# Altium PCB PCB3.PcbDoc
Units mm, origin at the board's own origin, x right, y up, seen from the top; angles counter-clockwise.
Board outline 97 x 213 mm, 2 copper layers (Top Layer, Bottom Layer); 120 components, 32 nets, 214 pads, 0 vias.
Unrouted connection lines stored in the file: 57.
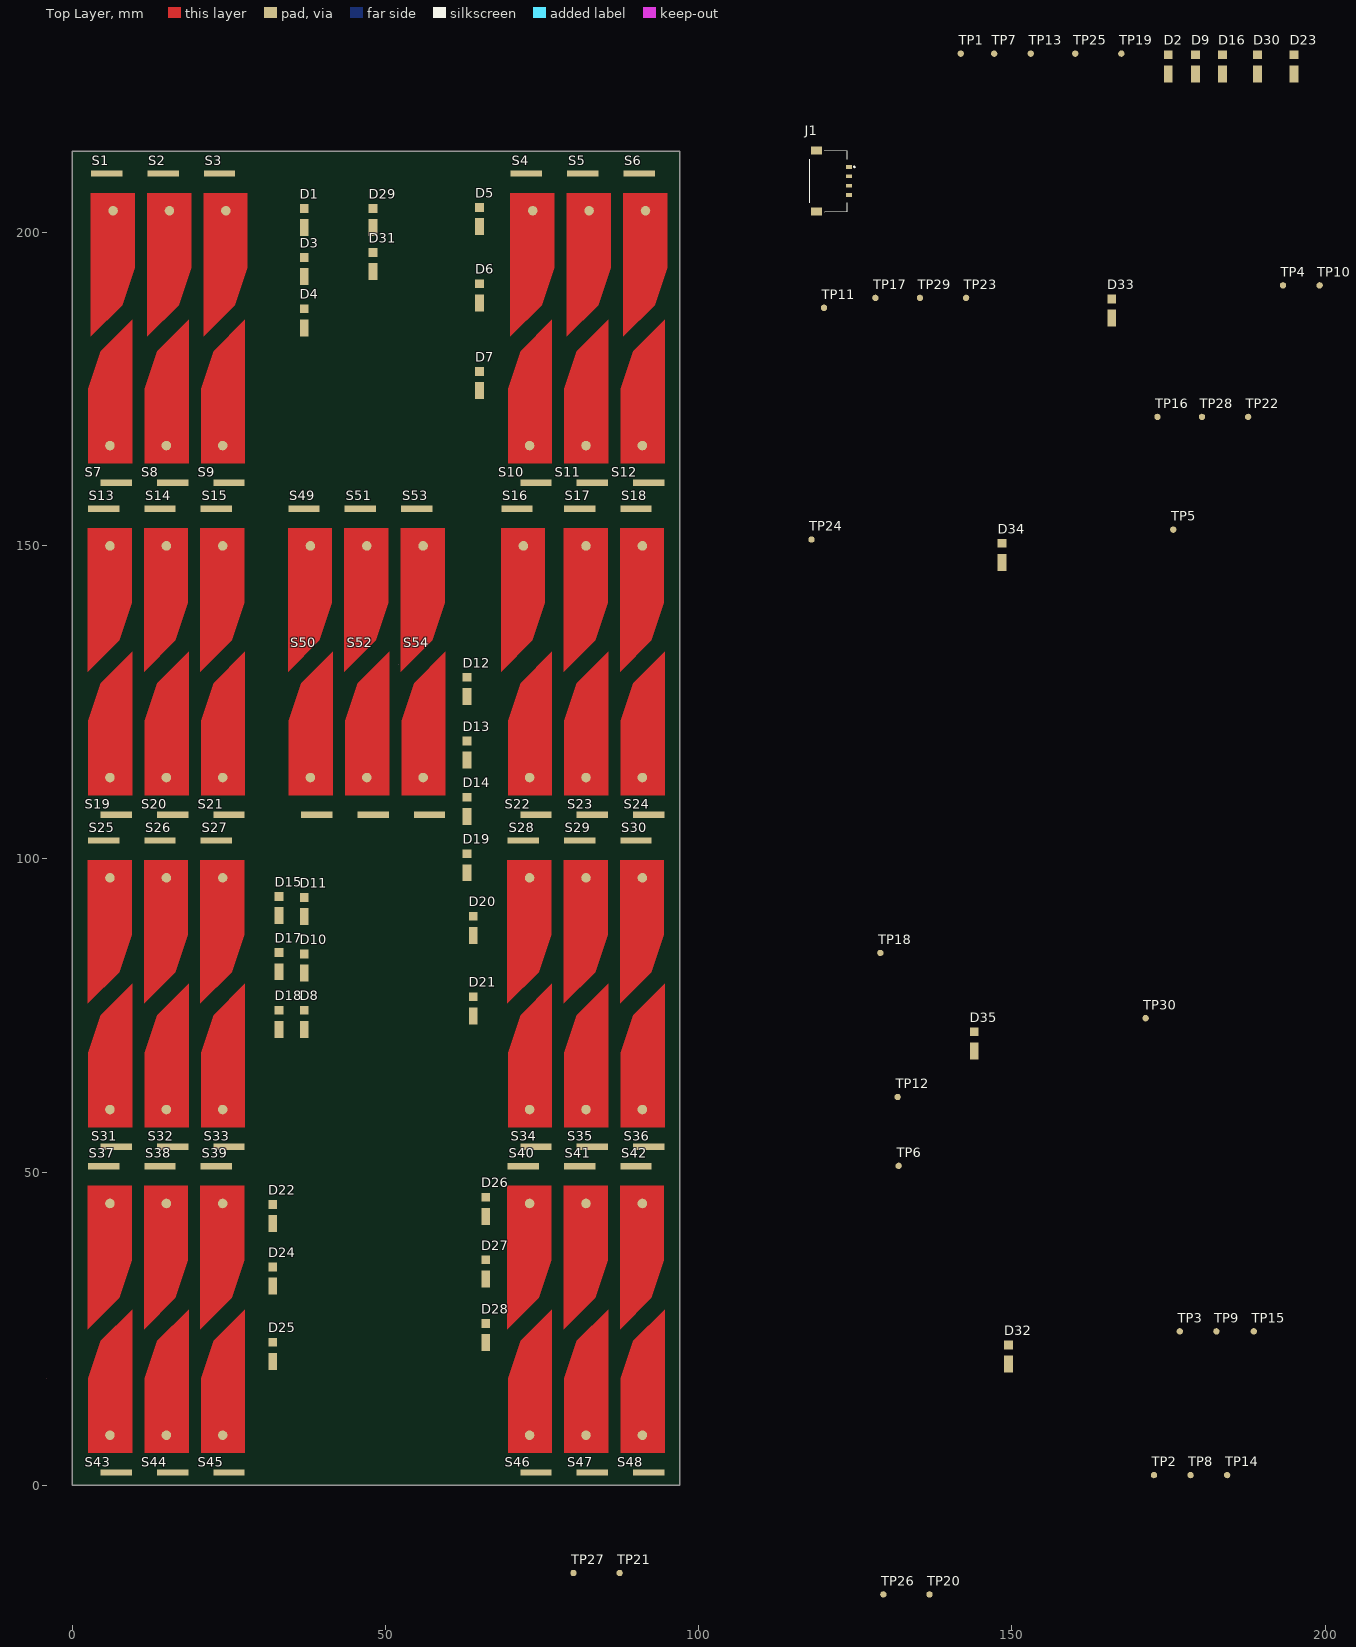
[diagram p0: Top Layer view]
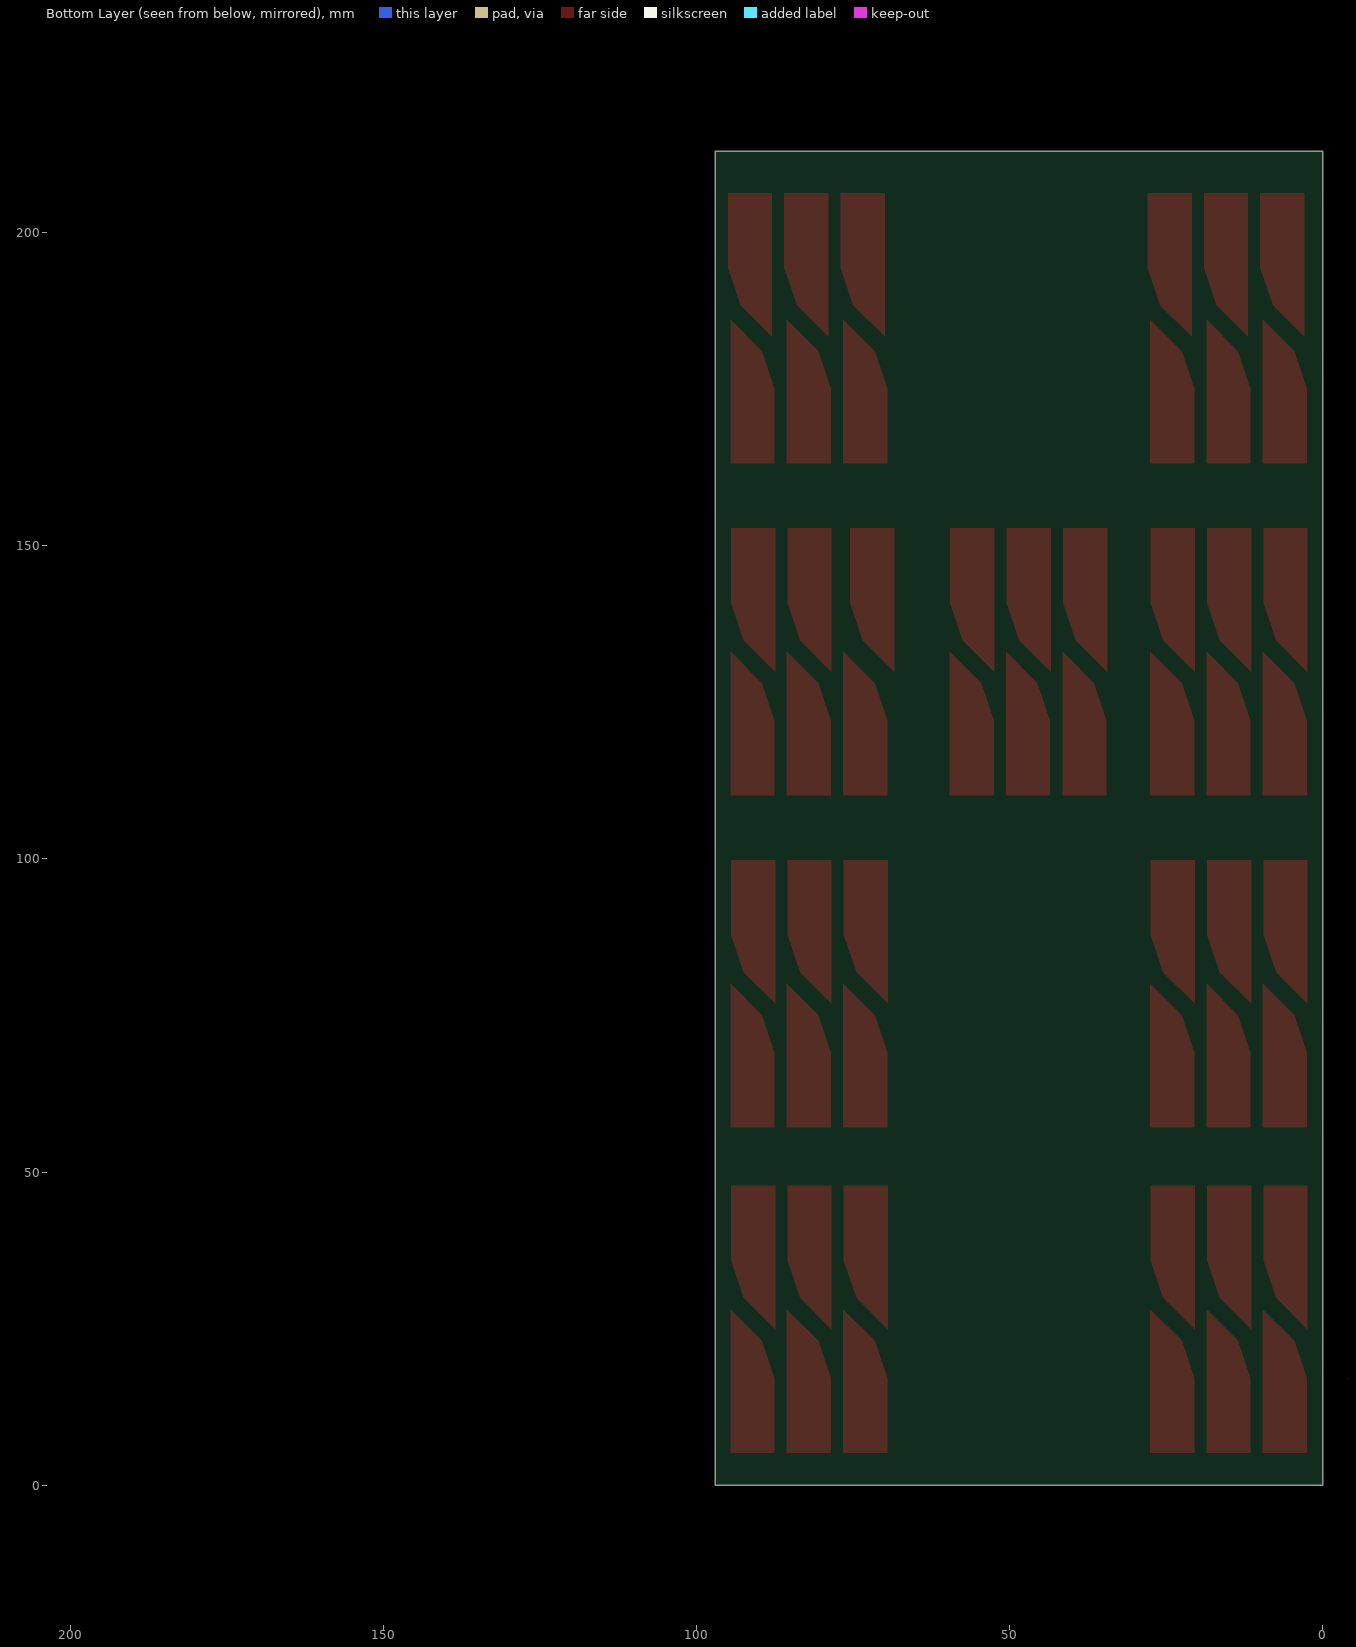
[diagram p1: Bottom Layer view, seen from below]

## Layer stack, top to bottom
Top Solder: solder mask 0.0102, Solder Resist, Dk 3.5
Top Layer: signal copper 0.0356
Dielectric 1: dielectric 0.32, FR-4, Dk 4.8
Bottom Layer: signal copper 0.0356
Bottom Solder: solder mask 0.0102, Solder Resist, Dk 3.5

## Board outline
0,0 97,0 97,213 0,213
cut-out: 52,131
cut-out: -4.127,17

## Design rules (kind name [scope] priority, off if disabled: settings)
Clearance [All] p1: gap=0.254 ignorepadtopadclearanceinfootprint=FALSE except(0: Arc-Hole Track-Hole SMDPad-Hole THPad-Hole Via-Hole Fill-Hole Poly-Hole Region-Hole Text-Hole)
PolygonConnect [All] p1: connectstyle=Relief reliefconductorwidth=0.254 reliefentries=4 polygonreliefangle="90 Angle" airgapwidth=0.254
RoomDefinition SolarPanel4 [InComponentClass('SolarPanel4')] p1: confinementstyle=ConfineIn formatcopy=TRUE lockcomponents=FALSE outline 0,0 97,0 97,213 0,213
RoutingVias [All] p1: holewidth=0.711 width=1.27 viastyle="Through Hole" minholewidth=0.711 minwidth=1.27 maxholewidth=0.711 maxwidth=1.27
SolderMaskExpansion [All] p1: expansion=0.102
Width [All] p1: maxlimit=0.254 minlimit=0.254 preferedwidth=0.254
30 further rules are at their usual default settings.

## Components (designator, comment, footprint, x,y, rotation, side; value= is the part's Value field where it differs from the comment)
D1 "SCHOTTKY_DIODE_B120-FDICT-NDSCHOTTKY_DIODE_B120-FDICT-ND" SB_DIODE 37,202 r90 top (schematic designator D2)
D2 "SCHOTTKY_DIODE_B120-FDICT-NDSCHOTTKY_DIODE_B120-FDICT-ND" SB_DIODE 174.976,226.55 r90 top
D3 "SCHOTTKY_DIODE_B120-FDICT-NDSCHOTTKY_DIODE_B120-FDICT-ND" SB_DIODE 37,194.2 r90 top
D4 "SCHOTTKY_DIODE_B120-FDICT-NDSCHOTTKY_DIODE_B120-FDICT-ND" SB_DIODE 37,186 r90 top
D5 "SCHOTTKY_DIODE_B120-FDICT-NDSCHOTTKY_DIODE_B120-FDICT-ND" SB_DIODE 65,202.15 r90 top
D6 "SCHOTTKY_DIODE_B120-FDICT-NDSCHOTTKY_DIODE_B120-FDICT-ND" SB_DIODE 65,190 r90 top
D7 "SCHOTTKY_DIODE_B120-FDICT-NDSCHOTTKY_DIODE_B120-FDICT-ND" SB_DIODE 65,176 r90 top
D8 "SCHOTTKY_DIODE_B120-FDICT-NDSCHOTTKY_DIODE_B120-FDICT-ND" SB_DIODE 37,74 r90 top
D9 "SCHOTTKY_DIODE_B120-FDICT-NDSCHOTTKY_DIODE_B120-FDICT-ND" SB_DIODE 179.294,226.55 r90 top
D10 "SCHOTTKY_DIODE_B120-FDICT-NDSCHOTTKY_DIODE_B120-FDICT-ND" SB_DIODE 37,83 r90 top
D11 "SCHOTTKY_DIODE_B120-FDICT-NDSCHOTTKY_DIODE_B120-FDICT-ND" SB_DIODE 37,92 r90 top
D12 "SCHOTTKY_DIODE_B120-FDICT-NDSCHOTTKY_DIODE_B120-FDICT-ND" SB_DIODE 63,127.15 r90 top
D13 "SCHOTTKY_DIODE_B120-FDICT-NDSCHOTTKY_DIODE_B120-FDICT-ND" SB_DIODE 63,117 r90 top
D14 "SCHOTTKY_DIODE_B120-FDICT-NDSCHOTTKY_DIODE_B120-FDICT-ND" SB_DIODE 63,108 r90 top
D15 "SCHOTTKY_DIODE_B120-FDICT-NDSCHOTTKY_DIODE_B120-FDICT-ND" SB_DIODE 33,92.15 r90 top (schematic designator D16)
D16 "SCHOTTKY_DIODE_B120-FDICT-NDSCHOTTKY_DIODE_B120-FDICT-ND" SB_DIODE 183.612,226.55 r90 top
D17 "SCHOTTKY_DIODE_B120-FDICT-NDSCHOTTKY_DIODE_B120-FDICT-ND" SB_DIODE 33,83.2 r90 top
D18 "SCHOTTKY_DIODE_B120-FDICT-NDSCHOTTKY_DIODE_B120-FDICT-ND" SB_DIODE 33,74 r90 top
D19 "SCHOTTKY_DIODE_B120-FDICT-NDSCHOTTKY_DIODE_B120-FDICT-ND" SB_DIODE 63,99 r90 top
D20 "SCHOTTKY_DIODE_B120-FDICT-NDSCHOTTKY_DIODE_B120-FDICT-ND" SB_DIODE 64,89 r90 top
D21 "SCHOTTKY_DIODE_B120-FDICT-NDSCHOTTKY_DIODE_B120-FDICT-ND" SB_DIODE 64,76.15 r90 top
D22 "SCHOTTKY_DIODE_B120-FDICT-NDSCHOTTKY_DIODE_B120-FDICT-ND" SB_DIODE 32,43 r90 top (schematic designator D23)
D23 "SCHOTTKY_DIODE_B120-FDICT-NDSCHOTTKY_DIODE_B120-FDICT-ND" SB_DIODE 195.042,226.55 r90 top
D24 "SCHOTTKY_DIODE_B120-FDICT-NDSCHOTTKY_DIODE_B120-FDICT-ND" SB_DIODE 32,33 r90 top
D25 "SCHOTTKY_DIODE_B120-FDICT-NDSCHOTTKY_DIODE_B120-FDICT-ND" SB_DIODE 32,21 r90 top
D26 "SCHOTTKY_DIODE_B120-FDICT-NDSCHOTTKY_DIODE_B120-FDICT-ND" SB_DIODE 66,44.15 r90 top
D27 "SCHOTTKY_DIODE_B120-FDICT-NDSCHOTTKY_DIODE_B120-FDICT-ND" SB_DIODE 66,34.15 r90 top
D28 "SCHOTTKY_DIODE_B120-FDICT-NDSCHOTTKY_DIODE_B120-FDICT-ND" SB_DIODE 66,24 r90 top
D29 "SCHOTTKY_DIODE_B120-FDICT-NDSCHOTTKY_DIODE_B120-FDICT-ND" SB_DIODE 48,202 r90 top
D30 "SCHOTTKY_DIODE_B120-FDICT-NDSCHOTTKY_DIODE_B120-FDICT-ND" SB_DIODE 189.2,226.55 r90 top
D31 "SCHOTTKY_DIODE_B120-FDICT-NDSCHOTTKY_DIODE_B120-FDICT-ND" SB_DIODE 48,195 r90 top
D32 "SCHOTTKY_DIODE_B120-FDICT-NDSCHOTTKY_DIODE_B120-FDICT-ND" SB_DIODE 149.45,20.55 r90 top
D33 "SCHOTTKY_DIODE_B120-FDICT-NDSCHOTTKY_DIODE_B120-FDICT-ND" SB_DIODE 165.925,187.55 r90 top
D34 "SCHOTTKY_DIODE_B120-FDICT-NDSCHOTTKY_DIODE_B120-FDICT-ND" SB_DIODE 148.4,148.55 r90 top
D35 "SCHOTTKY_DIODE_B120-FDICT-NDSCHOTTKY_DIODE_B120-FDICT-ND" SB_DIODE 143.986,70.55 r90 top
J1 "5040500491" 5040500491 120.753,208.25 r90 top
S1 "SOLAR_CELL" SOLAR_CELL 2.944,183.434 r0 top (schematic designator S2)
S2 "SOLAR_CELL" SOLAR_CELL 11.944,183.434 r0 top (schematic designator S3)
S3 "SOLAR_CELL" SOLAR_CELL 20.944,183.434 r0 top (schematic designator S4)
S4 "SOLAR_CELL" SOLAR_CELL 69.944,183.434 r0 top (schematic designator S1)
S5 "SOLAR_CELL" SOLAR_CELL 78.944,183.434 r0 top
S6 "SOLAR_CELL" SOLAR_CELL 87.944,183.434 r0 top
S7 "SOLAR_CELL" SOLAR_CELL 9.556,186.066 r180 top
S8 "SOLAR_CELL" SOLAR_CELL 18.556,186.066 r180 top
S9 "SOLAR_CELL" SOLAR_CELL 27.556,186.066 r180 top
S10 "SOLAR_CELL" SOLAR_CELL 76.556,186.066 r180 top
S11 "SOLAR_CELL" SOLAR_CELL 85.556,186.066 r180 top
S12 "SOLAR_CELL" SOLAR_CELL 94.556,186.066 r180 top
S13 "SOLAR_CELL" SOLAR_CELL 2.444,129.934 r0 top
S14 "SOLAR_CELL" SOLAR_CELL 11.444,129.934 r0 top
S15 "SOLAR_CELL" SOLAR_CELL 20.444,129.934 r0 top
S16 "SOLAR_CELL" SOLAR_CELL 68.444,129.934 r0 top
S17 "SOLAR_CELL" SOLAR_CELL 78.444,129.934 r0 top
S18 "SOLAR_CELL" SOLAR_CELL 87.444,129.934 r0 top
S19 "SOLAR_CELL" SOLAR_CELL 9.556,133.066 r180 top
S20 "SOLAR_CELL" SOLAR_CELL 18.556,133.066 r180 top
S21 "SOLAR_CELL" SOLAR_CELL 27.556,133.066 r180 top
S22 "SOLAR_CELL" SOLAR_CELL 76.556,133.066 r180 top
S23 "SOLAR_CELL" SOLAR_CELL 85.556,133.066 r180 top
S24 "SOLAR_CELL" SOLAR_CELL 94.556,133.066 r180 top
S25 "SOLAR_CELL" SOLAR_CELL 2.444,76.934 r0 top
S26 "SOLAR_CELL" SOLAR_CELL 11.444,76.934 r0 top
S27 "SOLAR_CELL" SOLAR_CELL 20.444,76.934 r0 top
S28 "SOLAR_CELL" SOLAR_CELL 69.444,76.934 r0 top
S29 "SOLAR_CELL" SOLAR_CELL 78.444,76.934 r0 top
S30 "SOLAR_CELL" SOLAR_CELL 87.444,76.934 r0 top
S31 "SOLAR_CELL" SOLAR_CELL 9.556,80.066 r180 top
S32 "SOLAR_CELL" SOLAR_CELL 18.556,80.066 r180 top
S33 "SOLAR_CELL" SOLAR_CELL 27.556,80.066 r180 top
S34 "SOLAR_CELL" SOLAR_CELL 76.556,80.066 r180 top
S35 "SOLAR_CELL" SOLAR_CELL 85.556,80.066 r180 top
S36 "SOLAR_CELL" SOLAR_CELL 94.556,80.066 r180 top
S37 "SOLAR_CELL" SOLAR_CELL 2.444,24.934 r0 top
S38 "SOLAR_CELL" SOLAR_CELL 11.444,24.934 r0 top
S39 "SOLAR_CELL" SOLAR_CELL 20.444,24.934 r0 top
S40 "SOLAR_CELL" SOLAR_CELL 69.444,24.934 r0 top
S41 "SOLAR_CELL" SOLAR_CELL 78.444,24.934 r0 top
S42 "SOLAR_CELL" SOLAR_CELL 87.444,24.934 r0 top
S43 "SOLAR_CELL" SOLAR_CELL 9.556,28.066 r180 top
S44 "SOLAR_CELL" SOLAR_CELL 18.556,28.066 r180 top
S45 "SOLAR_CELL" SOLAR_CELL 27.556,28.066 r180 top
S46 "SOLAR_CELL" SOLAR_CELL 76.556,28.066 r180 top
S47 "SOLAR_CELL" SOLAR_CELL 85.556,28.066 r180 top
S48 "SOLAR_CELL" SOLAR_CELL 94.556,28.066 r180 top
S49 "SOLAR_CELL" SOLAR_CELL 34.444,129.934 r0 top
S50 "SOLAR_CELL" SOLAR_CELL 41.556,133.066 r180 top
S51 "SOLAR_CELL" SOLAR_CELL 43.444,129.934 r0 top
S52 "SOLAR_CELL" SOLAR_CELL 50.556,133.066 r180 top
S53 "SOLAR_CELL" SOLAR_CELL 52.444,129.934 r0 top
S54 "SOLAR_CELL" SOLAR_CELL 59.556,133.066 r180 top
TP1 "TEST_POINT" TEST_POINT 141.829,228.582 r90 top
TP2 "TEST_POINT" TEST_POINT 172.684,1.635 r90 top
TP3 "TEST_POINT" TEST_POINT 176.81,24.582 r90 top
TP4 "TEST_POINT" TEST_POINT 193.285,191.582 r90 top
TP5 "TEST_POINT" TEST_POINT 175.76,152.582 r90 top
TP6 "TEST_POINT" TEST_POINT 131.919,51 r90 top
TP7 "TEST_POINT" TEST_POINT 147.163,228.582 r90 top
TP8 "TEST_POINT" TEST_POINT 178.526,1.635 r90 top
TP9 "TEST_POINT" TEST_POINT 182.652,24.582 r90 top
TP10 "TEST_POINT" TEST_POINT 199.127,191.582 r90 top
TP11 "TEST_POINT" TEST_POINT 120,188 r90 top
TP12 "TEST_POINT" TEST_POINT 131.761,62 r90 top
TP13 "TEST_POINT" TEST_POINT 153.005,228.582 r90 top
TP14 "TEST_POINT" TEST_POINT 184.368,1.635 r90 top
TP15 "TEST_POINT" TEST_POINT 188.621,24.582 r90 top
TP16 "TEST_POINT" TEST_POINT 173.239,170.582 r90 top
TP17 "TEST_POINT" TEST_POINT 128.206,189.582 r90 top
TP18 "TEST_POINT" TEST_POINT 129,85 r90 top
TP19 "TEST_POINT" TEST_POINT 167.483,228.582 r90 top
TP20 "TEST_POINT" TEST_POINT 136.846,-17.418 r90 top
TP21 "TEST_POINT" TEST_POINT 87.366,-14 r90 top
TP22 "TEST_POINT" TEST_POINT 187.717,170.582 r90 top
TP23 "TEST_POINT" TEST_POINT 142.684,189.582 r90 top
TP24 "TEST_POINT" TEST_POINT 118,151 r90 top
TP25 "TEST_POINT" TEST_POINT 160.117,228.582 r90 top
TP26 "TEST_POINT" TEST_POINT 129.48,-17.418 r90 top
TP27 "TEST_POINT" TEST_POINT 80,-14 r90 top
TP28 "TEST_POINT" TEST_POINT 180.351,170.582 r90 top
TP29 "TEST_POINT" TEST_POINT 135.318,189.582 r90 top
TP30 "TEST_POINT" TEST_POINT 171.346,74.582 r90 top

## Footprints (in the part's own frame and the unit in brackets; to place one, negate y for a bottom-side part, rotate by r counter-clockwise, add the part's x,y. Pads: shape width x height; smd on the part's side, far side on the other; paste and mask are expansions set on the pad)
5040500491 [mm]
  rect 0.6x1 smd: 1(2.25,-3.247) 2(0.75,-3.247) 3(-0.75,-3.247) 4(-2.25,-3.247)
  rect 1.25x1.8 smd: MP1(4.855,1.943) MP2(-4.855,1.943)
  silkscreen extent -4.87,-4.2 4.87,3, body extent 0,0 0,0
SB_DIODE [mm]
  rect 2.7x1.4 smd: NEG(-1.2,0)
  rect 1.4x1.4 smd: POS(1.85,0)
SOLAR_CELL [mil]
  rect 196.85x39.37 smd: NEG(100,1023.62)
  round 60 smd: POS(140,790)
  Top Layer region: 0,900 275.59,900 275.59,433.07 196.85,196.85 0,0
TEST_POINT [mil]
  round 40 smd: PAD(0,0)

## Part data
D1 D2 D3 D4 D5 D6 D7 D8 D9 D10 D11 D12 D13 D14 D15 D16 D17 D18 D19 D20 D21 D22 D23 D24 D25 D26 D27 D28 D29 D30 D31 D32 D33 D34 D35: Package=SCHOTTKY_DIODE_B120-FDICT-ND, DeviceName=SCHOTTKY_DIODE_B120-FDICT-ND, DeviceSetName=SCHOTTKY_DIODE_B120-FDICT-ND, GateName_1=G$1, LibraryName=Solar_Fadi, SymbolName_1=SCHOTTKY_DIODE_B120-FDICT-ND
J1: "Connector", Manufacturer_Name=Molex, Allied_Number=70331790, Allied Price/Stock=https://www.alliedelec.com/molex-incorporated-5040500491/70331790/, Datasheet Link=https://www.molex.com/pdm_docs/sd/5040500691_sd.pdf, Height=2.15mm, Manufacturer_Part_Number=5040500491

## Nets (pads, with @x,y where several pads share a name; then routed paths per layer and width w, separated by ;. In a path a pad name is that pad's centre, name@x,y a point inside that pad or via, vN(x,y) a via of type N, cw(c..) or ccw(c..) an arc to the next point about the centre after c; other vN are vias at no path point)
GND: D7.POS D14.POS D21.POS D28.POS D35.POS J1.2 J1.3
NetD2_NEG: D2.NEG D9.NEG D16.NEG D23.NEG D30.NEG
NetD2_POS: D2.POS
NetD3_NEG: D3.NEG TP2.PAD
NetD3_POS: D3.POS D4.NEG TP3.PAD
NetD4_POS: D4.POS D5.NEG TP4.PAD
NetD5_POS: D5.POS D6.NEG TP5.PAD
NetD6_POS: D6.POS D7.NEG TP6.PAD
NetD9_POS: D9.POS
NetD10_NEG: D10.NEG TP8.PAD
NetD10_POS: D10.POS D11.NEG TP9.PAD
NetD11_POS: D11.POS D12.NEG TP10.PAD
NetD12_POS: D12.POS D13.NEG TP11.PAD
NetD13_POS: D13.POS D14.NEG TP12.PAD
NetD16_POS: D16.POS
NetD17_NEG: D17.NEG TP14.PAD
NetD17_POS: D17.POS D18.NEG TP15.PAD
NetD18_POS: D18.POS D19.NEG TP16.PAD
NetD19_POS: D19.POS D20.NEG TP17.PAD
NetD20_POS: D20.POS D21.NEG TP18.PAD
NetD23_POS: D23.POS
NetD24_NEG: D24.NEG TP20.PAD
NetD24_POS: D24.POS D25.NEG TP21.PAD
NetD25_POS: D25.POS D26.NEG TP22.PAD
NetD26_POS: D26.POS D27.NEG TP23.PAD
NetD27_POS: D27.POS D28.NEG TP24.PAD
NetD30_POS: D30.POS J1.1 J1.4
NetD31_NEG: D31.NEG TP26.PAD
NetD31_POS: D31.POS D32.NEG TP27.PAD
NetD32_POS: D32.POS D33.NEG TP28.PAD
NetD33_POS: D33.POS D34.NEG TP29.PAD
NetD34_POS: D34.POS D35.NEG TP30.PAD
pads on no net: D1.NEG D1.POS D8.NEG D8.POS D15.NEG D15.POS D22.NEG D22.POS D29.NEG D29.POS J1.MP1 J1.MP2 S1.NEG S1.POS S2.NEG S2.POS S3.NEG S3.POS S4.NEG S4.POS S5.NEG S5.POS S6.NEG S6.POS S7.NEG S7.POS S8.NEG S8.POS S9.NEG S9.POS S10.NEG S10.POS S11.NEG S11.POS S12.NEG S12.POS S13.NEG S13.POS S14.NEG S14.POS S15.NEG S15.POS S16.NEG S16.POS S17.NEG S17.POS S18.NEG S18.POS S19.NEG S19.POS S20.NEG S20.POS S21.NEG S21.POS S22.NEG S22.POS S23.NEG S23.POS S24.NEG S24.POS S25.NEG S25.POS S26.NEG S26.POS S27.NEG S27.POS S28.NEG S28.POS S29.NEG S29.POS S30.NEG S30.POS S31.NEG S31.POS S32.NEG S32.POS S33.NEG S33.POS S34.NEG S34.POS S35.NEG S35.POS S36.NEG S36.POS S37.NEG S37.POS S38.NEG S38.POS S39.NEG S39.POS S40.NEG S40.POS S41.NEG S41.POS S42.NEG S42.POS S43.NEG S43.POS S44.NEG S44.POS S45.NEG S45.POS S46.NEG S46.POS S47.NEG S47.POS S48.NEG S48.POS S49.NEG S49.POS S50.NEG S50.POS S51.NEG S51.POS S52.NEG S52.POS S53.NEG S53.POS S54.NEG S54.POS TP1.PAD TP7.PAD TP13.PAD TP19.PAD TP25.PAD

## Silkscreen, mask and mechanical layers (free items; w line width, h text height)
Conflict Region:
  lines w0.5: 0,206.5 9,206.5 11.875,206.5 17.625,206.5 29.5,206.5 97,206.5 ; 48.5,0 48.5,213 ; 48.5,213 39.969,213 39.812,212.844 39.656,213 31.125,213 14.375,213 5.844,213 5.687,212.844 5.531,213 0,213 0,0 75,0 97,0 97,42.422 97,54 ; 48.5,213 52,213 97,213 97,76.25 97,64.766 97,54 ; 97,54 97,54